# EAGLE board wchair - Copy (3) (EAGLE 9.2.2)
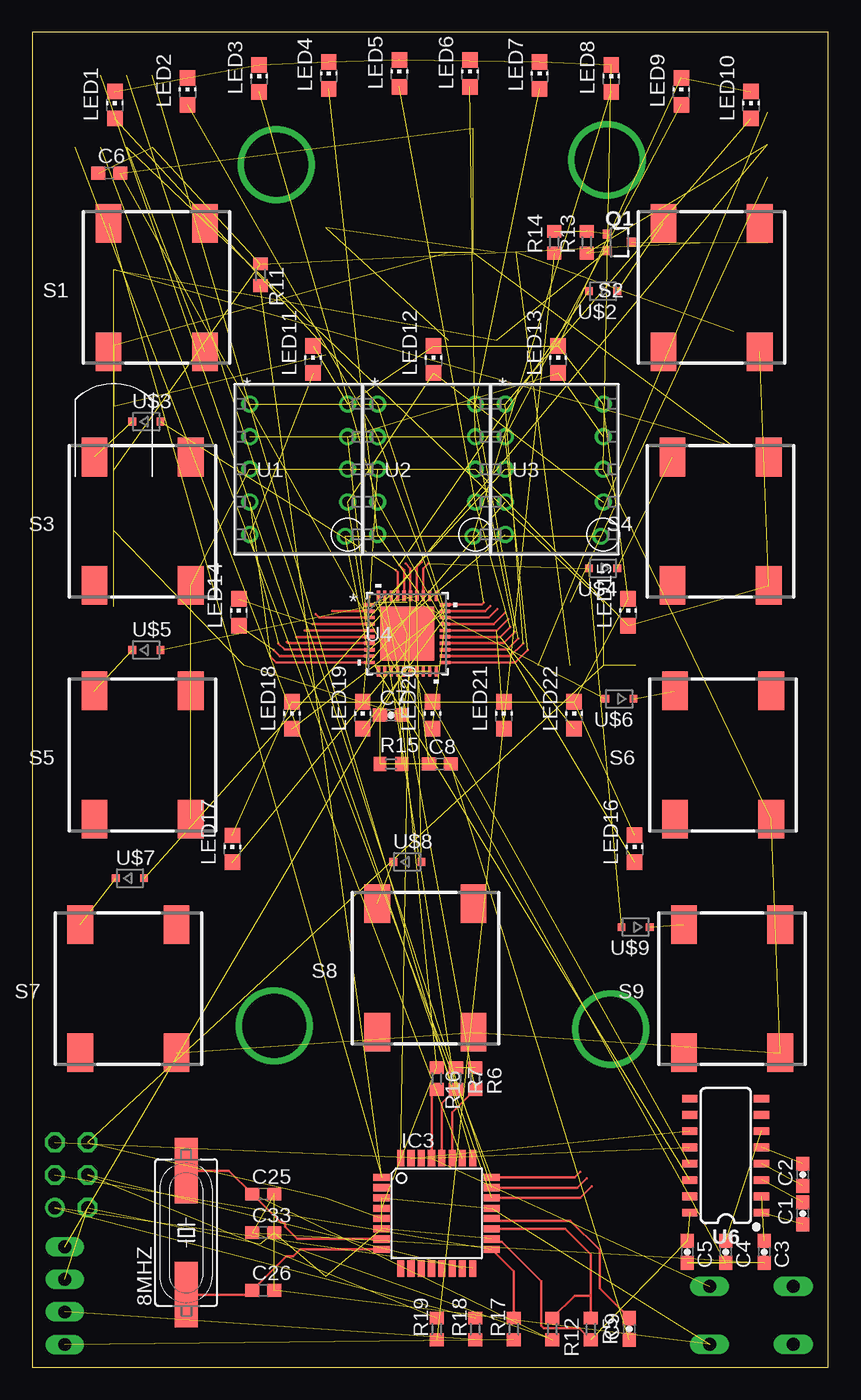
[diagram p0: board, top side]
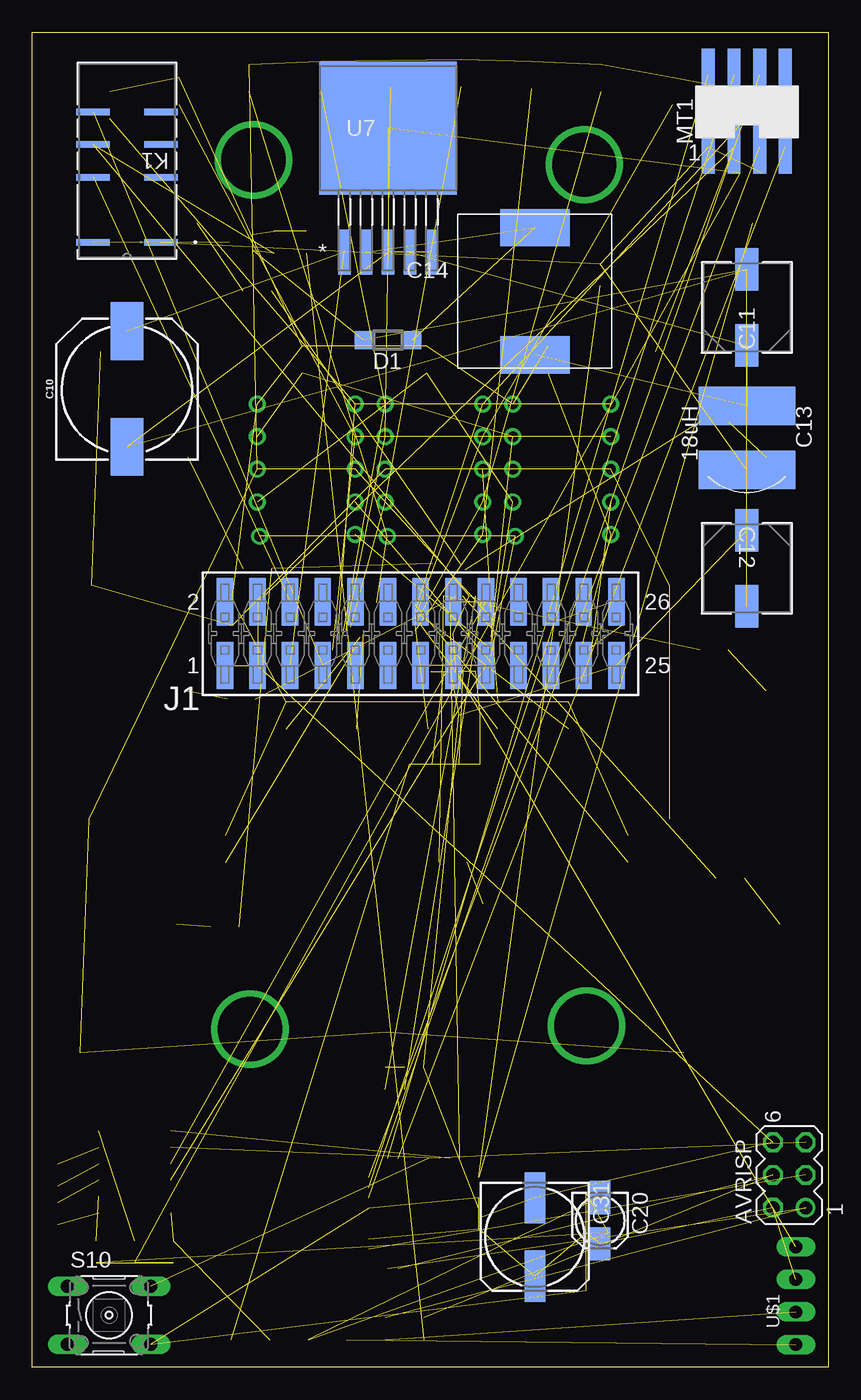
[diagram p1: board, bottom side, seen from below]

Size 62 x 104 mm. Coordinates in mm from the lower left corner, seen from the top.
Outline: 0,0 62,0 62,104 0,104 0,0
Copper layers (1*16): Top 0.035mm / dielectric 1.5mm / Bottom 0.035mm
Design rules "default": minimum track width 6mil, minimum drill 0.35mm, track to track 6mil, track to pad 6mil, pad to pad 6mil, via to via 6mil, smd to smd 6mil, copper to edge 40mil, drill to drill 6mil, minimum pad ring 10mil, minimum via ring 8mil, stop-mask expansion 4mil, vias tented up to drill 0mil, thermal gap 10mil
Net classes: 1 supply: width 0.127 mm, clearance 0.203 mm

## Footprints (pad centres in the part's own frame; a part is rotated, then mirrored left to right if it is on the bottom)
SM49 = smd 5.08 x 1.778: 1 -4.826,0; 2 4.826,0
MA03-2 = drill 1.016: 1 -2.54,-1.27 | drill 1.016 octagon: 2 -2.54,1.27; 3 0,-1.27; 4 0,1.27; 5 2.54,-1.27; 6 2.54,1.27
0603-CAP = smd 1.1 x 1: 1 -0.85,0; 2 0.85,0
C0603 = smd 1.1 x 1: 1 -0.85,0; 2 0.85,0
NIC_10X10.5_CAP = smd 4.5 x 2.5: + 4.5,0; - -4.5,0
CAP_EEFK_D8 = smd 3.302 x 1.778: 1 -2.959,0; 2 2.959,0
CAP_EEE_D = smd 3.302 x 1.778: 1 -2.959,0; 2 2.959,0
18UH2.15A = smd 3 x 7.5: 1 -2.5,0; 2 2.5,0
732-1698-1-ND = smd 5.4 x 2.9: 1 0,4.95; 2 0,-4.95
153CLV-0405 = smd 2.6 x 1.6: + 1.8,0; - -1.8,0
153CLV-0807 = smd 4 x 1.6: + 3.05,0; - -3.05,0
SOD123 = smd 1.4 x 1.4: A 1.9,0; C -1.9,0
TQFP32-08 = smd 1.27 x 0.559: 1 -4.293,2.8; 2 -4.293,2; 3 -4.293,1.2; 4 -4.293,0.4; 5 -4.293,-0.4; 6 -4.293,-1.2; 7 -4.293,-2; 8 -4.293,-2.8; 17 4.293,-2.8; 18 4.293,-2; 19 4.293,-1.2; 20 4.293,-0.4; 21 4.293,0.4; 22 4.293,1.2; 23 4.293,2; 24 4.293,2.8 | smd 0.559 x 1.27: 9 -2.8,-4.293; 10 -2,-4.293; 11 -1.2,-4.293; 12 -0.4,-4.293; 13 0.4,-4.293; 14 1.2,-4.293; 15 2,-4.293; 16 2.8,-4.293; 25 2.8,4.293; 26 2,4.293; 27 1.2,4.293; 28 0.4,4.293; 29 -0.4,4.293; 30 -1.2,4.293; 31 -2,4.293; 32 -2.8,4.293
SAMTEC-TSM-113-01-X-DV = smd 1.27 x 3.68: 1 -15.24,-2.476; 2 -15.24,2.476; 3 -12.7,-2.476; 4 -12.7,2.476; 5 -10.16,-2.476; 6 -10.16,2.476; 7 -7.62,-2.476; 8 -7.62,2.476; 9 -5.08,-2.476; 10 -5.08,2.476; 11 -2.54,-2.476; 12 -2.54,2.476; 13 0,-2.476; 14 0,2.476; 15 2.54,-2.476; 16 2.54,2.476; 17 5.08,-2.476; 18 5.08,2.476; 19 7.62,-2.476; 20 7.62,2.476; 21 10.16,-2.476; 22 10.16,2.476; 23 12.7,-2.476; 24 12.7,2.476; 25 15.24,-2.476; 26 15.24,2.476
EE2NUH = smd 2.616 x 0.508: 1 -2.642,6.363; 3 -2.642,1.283; 4 -2.642,-1.257; 5 -2.642,-3.797; 8 2.642,-3.797; 9 2.642,-1.257; 10 2.642,1.283; 12 2.642,6.363
CHIP-LED0805 = smd 1.2 x 1.2: A 0,-1.05; C 0,1.05
MINITEK2-8PINS = smd 1 x 4.1: F1 -3,-2.75; F2 -3,2.85; F3 -1,-2.75; F4 -1,2.85; F5 1,-2.75; F6 1,2.85; F7 3,-2.75; F8 3,2.85
SOT323 = smd 0.7 x 0.7: 1 -0.65,-0.925; 2 0.65,-0.925; 3 0,0.925
R0603 = smd 1 x 1.1: 1 -0.85,0; 2 0.85,0
IP40-J-LEAD = smd 3 x 2: 1 -5,-3.75; 2 5,-3.75; 3 5,3.75; 4 -5,3.75
B3F-10XX = drill 1.016 long: 1 -3.251,2.261; 2 3.251,2.261; 3 -3.251,-2.261; 4 3.251,-2.261
DIP10_TDS = drill 0.813 pad 1.321: 1 -3.725,5.93; 2 -3.725,3.39; 3 -3.725,0.85; 4 -3.725,-1.69; 5 -3.725,-4.23; 6 3.707,-4.37; 7 3.895,-1.69; 8 3.895,0.85; 9 3.895,3.39; 10 3.895,5.93
21-0141I_T4066-5 = smd 0.813 x 0.254: 1 -2.946,2.25; 2 -2.946,1.75; 3 -2.946,1.25; 4 -2.946,0.75; 5 -2.946,0.25; 6 -2.946,-0.25; 7 -2.946,-0.75; 8 -2.946,-1.25; 9 -2.946,-1.75; 10 -2.946,-2.25; 21 2.946,-2.25; 22 2.946,-1.75; 23 2.946,-1.25; 24 2.946,-0.75; 25 2.946,-0.25; 26 2.946,0.25; 27 2.946,0.75; 28 2.946,1.25; 29 2.946,1.75; 30 2.946,2.25 | smd 0.254 x 0.813: 11 -2.25,-2.946; 12 -1.75,-2.946; 13 -1.25,-2.946; 14 -0.75,-2.946; 15 -0.25,-2.946; 16 0.25,-2.946; 17 0.75,-2.946; 18 1.25,-2.946; 19 1.75,-2.946; 20 2.25,-2.946; 31 2.25,2.946; 32 1.75,2.946; 33 1.25,2.946; 34 0.75,2.946; 35 0.25,2.946; 36 -0.25,2.946; 37 -0.75,2.946; 38 -1.25,2.946; 39 -1.75,2.946; 40 -2.25,2.946 | smd 4.191 x 4.191: 41 0,0
SO16 = smd 0.6 x 1.2: 1 -4.445,-2.8; 2 -3.175,-2.8; 3 -1.905,-2.8; 4 -0.635,-2.8; 5 0.635,-2.8; 6 1.905,-2.8; 7 3.175,-2.8; 8 4.445,-2.8; 9 4.445,2.8; 10 3.175,2.8; 11 1.905,2.8; 12 0.635,2.8; 13 -0.635,2.8; 14 -1.905,2.8; 15 -3.175,2.8; 16 -4.445,2.8
KTT5_6P22X6P86 = smd 0.965 x 3.505: 1 -3.4,-9.652; 2 -1.7,-9.652; 3 0,-9.652; 4 1.7,-9.652; 5 3.4,-9.652 | smd 10.719 x 10.363: 6 0,0
4-PIN-HEADER = drill 1 long: 1 -3.81,0; 2 -1.27,0; 3 1.27,0; 4 3.81,0
SOD-323 = smd 0.6 x 0.6: A 1.1,0; C -1.1,0

## Placement (x,y rotation side)
8MHZ  8MHz  [SM49]  12,10.5 90 top
AVRISP  [MA03-2]  3.05,14.99 90 bottom
C1  .1uF  [0603-CAP]  60,12 90 top
C2  .1uF  [0603-CAP]  60,15 90 top
C3  .1uF  [0603-CAP]  57,9 270 top
C4  .1uF  [0603-CAP]  54,9 270 top
C5  .1uF  [0603-CAP]  51,9 270 top
C6  2.2u  [C0603]  6,93 0 top
C7  .1uF  [0603-CAP]  27.94,50.8 0 top
C8  22pF  [C0603]  31.75,46.99 0 top
C9  .1uF  [0603-CAP]  46.5,3 90 top
C10  100uF  [NIC_10X10.5_CAP]  54.61,76.2 90 bottom
C11  330uF  [CAP_EEFK_D8]  6.35,82.55 90 bottom
C12  100uF  [CAP_EEE_D]  6.35,62.23 270 bottom
C13  18uH  [18UH2.15A]  6.35,72.39 270 bottom
C14  330uH  [732-1698-1-ND]  22.86,83.82 0 bottom
C20  10uF  [153CLV-0405]  17.78,11.43 270 bottom
C25  22pF  [C0603]  18,13.5 0 top
C26  22pF  [C0603]  18,6 0 top
C31  68uF  [153CLV-0807]  22.86,10.16 270 bottom
C33  2.2u  [C0603]  18,10.5 0 top
D1  MBR0520LT  [SOD123]  34.29,80.01 180 bottom
IC3  MEGA8-AI  [TQFP32-08]  31.5,12 0 top
J1  SAMTEC-TSM-113-01-X-DVJ  [SAMTEC-TSM-113-01-X-DV]  31.75,57.15 0 bottom
K1  EE2-5NUH-L  [EE2NUH]  54.61,93.98 180 bottom
LED1  [CHIP-LED0805]  6.44,98.31 0 top
LED2  [CHIP-LED0805]  12.1,99.38 0 top
LED3  [CHIP-LED0805]  17.68,100.4 0 top
LED4  [CHIP-LED0805]  23.1,100.62 0 top
LED5  [CHIP-LED0805]  28.59,100.78 0 top
LED6  [CHIP-LED0805]  34.09,100.78 0 top
LED7  [CHIP-LED0805]  39.52,100.62 0 top
LED8  [CHIP-LED0805]  45.09,100.4 0 top
LED9  [CHIP-LED0805]  50.55,99.38 0 top
LED10  [CHIP-LED0805]  55.97,98.31 0 top
LED11  [CHIP-LED0805]  21.87,78.5 0 top
LED12  [CHIP-LED0805]  31.26,78.5 0 top
LED13  [CHIP-LED0805]  40.95,78.5 0 top
LED14  [CHIP-LED0805]  16.09,58.81 0 top
LED15  [CHIP-LED0805]  46.41,58.81 0 top
LED16  [CHIP-LED0805]  46.91,40.38 0 top
LED17  [CHIP-LED0805]  15.59,40.38 0 top
LED18  [CHIP-LED0805]  20.23,50.79 0 top
LED19  [CHIP-LED0805]  25.75,50.79 0 top
LED20  [CHIP-LED0805]  31.17,50.79 0 top
LED21  [CHIP-LED0805]  36.73,50.79 0 top
LED22  [CHIP-LED0805]  42.2,50.79 0 top
MT1  MINITEK2-8PINS  [MINITEK2-8PINS]  6.35,97.79 0 bottom
Q1  310mA/60V/1.6Ω  [SOT323]  45.72,87.63 270 top
R5  390k  [R0603]  43.5,3 270 top
R6  4.7k  [R0603]  34.5,22.5 270 top
R7  4.7k  [R0603]  33,22.5 270 top
R11  10k  [R0603]  17.78,85.09 270 top
R12  100k  [R0603]  40.5,3 270 top
R13  100k  [R0603]  43.18,87.63 90 top
R14  220  [R0603]  40.64,87.63 90 top
R15  56k  [R0603]  27.94,46.99 0 top
R16  1k  [R0603]  31.5,22.5 270 top
R17  100  [R0603]  37.5,3 90 top
R18  100  [R0603]  34.5,3 90 top
R19  100  [R0603]  31.5,3 90 top
S1  1241.1619.23  [IP40-J-LEAD]  9.7,84.1 90 top
S2  1241.1619.23  [IP40-J-LEAD]  52.9,84.1 90 top
S3  1241.1619.23  [IP40-J-LEAD]  8.6,65.9 90 top
S4  1241.1619.23  [IP40-J-LEAD]  53.6,65.9 90 top
S5  1241.1619.23  [IP40-J-LEAD]  8.6,47.7 90 top
S6  1241.1619.23  [IP40-J-LEAD]  53.8,47.7 90 top
S7  1241.1619.23  [IP40-J-LEAD]  7.5,29.5 90 top
S8  1241.1619.23  [IP40-J-LEAD]  30.62,31.1 90 top
S9  1241.1619.23  [IP40-J-LEAD]  54.5,29.5 90 top
S10  [B3F-10XX]  56.01,4.06 0 bottom
U1  TDSG3160  [DIP10_TDS]  20.68,69.1 0 top
U2  TDSG3160  [DIP10_TDS]  30.62,69.1 0 top
U3  TDSG3160  [DIP10_TDS]  40.58,69.1 0 top
U4  MAX6955ATL+  [21-0141I_T4066-5]  29.21,57.15 0 top
U6  MAX3232  [SO16]  54,16.5 90 top
U7  TL2575HV-05IKTTR  [KTT5_6P22X6P86]  34.29,96.52 0 bottom
U$1  DEBUG  [4-PIN-HEADER]  2.54,5.59 90 bottom
U$2  SCHOTTKY  [SOD-323]  44.45,83.82 180 top
U$3  SCHOTTKY  [SOD-323]  8.89,73.66 0 top
U$4  SCHOTTKY  [SOD-323]  44.45,62.23 180 top
U$5  SCHOTTKY  [SOD-323]  8.89,55.88 0 top
U$6  SCHOTTKY  [SOD-323]  45.72,52.07 180 top
U$7  SCHOTTKY  [SOD-323]  7.62,38.1 0 top
U$8  SCHOTTKY  [SOD-323]  29.21,39.37 0 top
U$9  SCHOTTKY  [SOD-323]  46.99,34.29 180 top

## Library data of the parts
8MHZ = crystal; DIGIKEY: 535-9089-1-ND; OC_FARNELL: unknown; OC_NEWARK: unknown
AVRISP = con-lstb; DIGIKEY: ED10665-ND; OC_FARNELL: unknown; OC_NEWARK: unknown
C1-C5 C7 C9 = SparkFun-Capacitors; DIGIKEY: 399-15351-1-ND; PROD_ID: CAP-00810; SPARKLE_ID: 918
C6 C33 = adafruit; DIGIKEY: 1276-1183-1-ND
C8 C25 C26 = adafruit; DIGIKEY: 478-11384-1-ND
C10 = SparkFun-Capacitors; DIGIKEY: PCE3942CT-ND; PROD_ID: CAP-08362; SPICEPREFIX: C
C11 = my_lib; DIGIKEY: PCE3768CT-ND; MANUFACTURER_PART_NUMBER: EEEFK0J331XP; VENDOR: Panasonic
C12 = my_lib; DIGIKEY: PCE3852CT-ND; MANUFACTURER_PART_NUMBER: EEE0JA101SP; VENDOR: Panasonic
C13 = AAAmy_lib_chair; DIGIKEY: 732-4533-1-ND
C14 = AAAmy_lib_chair; DIGIKEY: 732-1698-1-ND
C20 = rcl; CODE: 865250140001; DIGIKEY: 493-2173-1-ND; SPICEPREFIX: C
C31 = rcl; CODE: EEEFC0J680P; DIGIKEY: PCE4412CT-ND‎; SPICEPREFIX: C
D1 = diode; DIGIKEY: MBR0520LCT-ND
IC3 = atmel; DIGIKEY: ATMEGA328P-AU-ND; MPN: ATMEGA8-16AU; OC_FARNELL: 9171371; OC_NEWARK: 73M8863
J1 = SAMTEC-TSM-113-01-X-DV; DESCRIPTION: Conn Unshrouded Header HDR 26 POS 2.54mm Solder ST SMD Automotive Tube; DIGI-KEY_PURCHASE_URL: https://www.digikey.com/product-detail/en/samtec-inc/TSM-113-01-L-DV/SAM10304-ND/6679041?utm_source=snapeda&utm_medium=aggregator&utm_campaign=symbol; DIGIKEY: SAM10304-ND; MF: Samtec Inc.; MP: TSM-113-01-L-DV; PACKAGE: None
K1 = AAAmy_lib_chair; DIGIKEY: 399-11016-1-ND‎; MANUFACTURER_PART_NUMBER: EE25NUHL; VENDOR: KEMET
LED1-LED22 = led; DIGIKEY: 1497-1434-1-ND
MT1 = my_lib; DIGIKEY: 609-5175-1-ND
Q1 = SparkFun-DiscreteSemi; DIGIKEY: SI2304BDS-T1-GE3CT-ND; PROD_ID: TRANS-11151
R5 = adafruit; DIGIKEY: 311-390KGRCT-ND
R6 R7 = adafruit; DIGIKEY: 311-4.7KGRCT-ND
R11 = rcl; DIGIKEY: RNCP0603FTD10K0CT-ND
R12 R13 = adafruit; DIGIKEY: RR08P100KDCT-ND
R14 = adafruit; DIGIKEY: A130087CT-ND
R15 = adafruit; DIGIKEY: 749-1667-1-ND
R16 = rcl; DIGIKEY: RHM1.0KDCT-ND
R17-R19 = rcl; DIGIKEY: RR08P100DCT-ND
S1-S9 = my_pushbot; DESCRIPTION: 1-pole on-off switch Latching Push Button Switch, IP67, PCB, 30 V ac, 42 V dc; DIGIKEY: 486-1931-1-ND; HEIGHT: mm; MANUFACTURER_NAME: SCHURTER; MANUFACTURER_PART_NUMBER: 1241.1619.23; MOUSER_PART_NUMBER: 693-1241.1619.23; MOUSER_PRICE-STOCK: https://www.mouser.com/Search/Refine.aspx?Keyword=693-1241.1619.23
S10 = switch-omron; DIGIKEY: SW400-ND; MPN: B3F-1000; OC_FARNELL: 176432; OC_NEWARK: 36M3542
U1-U3 = 7segment; DIGIKEY: TDSG3160-M-ND; MANUFACTURER_PART_NUMBER: TDSG3160; VENDOR: Vishay
U4 = AAAmy_lib_chair; DIGIKEY: MAX6955ATL+-ND; MANUFACTURER_PART_NUMBER: MAX6955ATL+; VENDOR: Maxim Integrated Products
U6 = SparkFun-IC-Comms; DIGIKEY: 296-14619-1-ND; PROD_ID: IC-08171
U7 = my_lib; DIGIKEY: 296-21833-1-ND; MANUFACTURER_PART_NUMBER: TL2575HV05IKTTR; VENDOR: Texas Instruments
U$1 = AAAmy_lib_chair; DIGIKEY: 0
U$2-U$9 = AAAmy_lib_chair; DIGIKEY: CUS520H3FDKR-ND

## Nets
C1+: C1.1 U6.1
C1-: C1.2 U6.3
C2+: C2.1 U6.4
C2-: C2.2 U6.5
GND: AVRISP.6 C3.2 C4.2 C5.2 C6.2 C7.1 C8.2 C9.1 C10.- C11.2 C12.2 C20.- C25.2 C26.2 C31.- C33.1 D1.A IC3.3 IC3.5 IC3.21 J1.1 J1.3 J1.4 K1.9 MT1.F3 Q1.2 R12.2 R13.1 R15.1 S1.1 S10.4 U4.1 U4.12 U4.13 U4.15 U4.38 U4.41 U6.15 U7.3 U7.5 U7.6 U$1.4
JOY_CNTR: IC3.22 MT1.F6
JOY_FR1: IC3.23 MT1.F4
JOY_FR2: IC3.24 MT1.F5
JOY_LR1: IC3.25 MT1.F2
JOY_LR2: IC3.26 MT1.F7
MISO: AVRISP.1 IC3.16 R18.2
MOSI: AVRISP.4 IC3.15 R19.2
N$1: S2.3 U$2.C
N$2: MT1.F8
N$3: S9.3 U$9.C
N$6: LED6.C
N$8: S7.3 U$7.C
N$11: U4.32
N$16: S8.3 U$8.C
N$17: Q1.1 R13.2 R14.2
N$18: S6.3 U$6.C
N$19: K1.12 Q1.3
N$20: S4.3 U$4.C
N$21: S5.3 U$5.C
N$22: S3.3 U$3.C
N$23: R6.1 R7.1
N$30: U4.31
N$31: R15.2 U4.14
N$32: C8.1 U4.17
N$35: 8MHZ.2 C25.1 IC3.7
N$36: 8MHZ.1 C26.1 IC3.8
N$37: C9.2 IC3.20
O0: LED15.A S2.1 S3.1 S4.1 S5.1 U1.3 U1.8 U2.3 U2.8 U4.2
O1: LED1.C LED2.C LED3.C LED4.C LED5.C LED7.C LED8.C S6.1 S7.1 S8.1 S9.1 U3.3 U3.8 U4.3
O2: LED9.C LED10.C LED11.C LED12.C LED13.C LED14.C LED15.C LED16.C LED17.C LED18.C LED19.C LED20.C LED21.C LED22.C U1.10 U3.10 U4.4
O3: U4.5
O4: LED13.A U1.9 U3.9 U4.6
O5: LED12.A U1.7 U3.7 U4.7
O6: LED11.A U1.5 U3.5 U4.8
O7: LED14.A U1.6 U3.6 U4.9
O8: U1.4 U3.4 U4.10
O9: LED9.A U1.2 U3.2 U4.21
O10: LED10.A U1.1 U3.1 U4.22
O11: LED7.A LED16.A U2.10 U4.23
O12: LED6.A U2.9 U4.24
O13: LED5.A LED22.A U2.7 U4.25
O14: LED4.A LED21.A U2.5 U4.26
O15: LED3.A LED20.A U2.4 U4.27
O16: LED2.A LED19.A U2.2 U4.28
O17: LED1.A LED18.A U2.1 U4.29
O18: LED8.A LED17.A U2.6 U4.30
P0: U4.36 U$2.A U$6.A
P1: U4.37 U$3.A U$7.A
P2: U4.33 U$4.A U$9.A
P3: U4.34 U$5.A U$8.A
P4: IC3.32 U4.35
R1IN: J1.16 J1.18 U6.13
R1OUT: IC3.30 U6.12
REG_FB: C11.1 C13.1 C14.2 U7.4
REG_P_O: C14.1 D1.C U7.2
RELAY_NC: J1.6 K1.10
RELAY_NO: J1.7 K1.8
RESET: AVRISP.5 IC3.29 R16.2 S10.2
RLY_OUT: R14.1 R19.1
RX: R17.1 U$1.1
SCK: AVRISP.3 IC3.17 R17.2
SCL: IC3.28 R7.2 U4.40
SDA: IC3.27 R6.2 U4.39
SW_ON: IC3.1 R11.2 S1.3
T1IN: IC3.31 U6.11
T1OUT: J1.13 J1.17 U6.14
TX: R18.1 U$1.2
V+: C3.1 U6.2
V-: C4.1 U6.6
V_BAT: IC3.19 R5.1 R12.1
VCC [supply]: AVRISP.2 C5.1 C6.1 C7.2 C12.1 C13.2 C20.+ C31.+ C33.2 IC3.4 IC3.6 IC3.18 J1.25 K1.1 MT1.F1 R5.2 R11.1 R16.1 U4.16 U4.18 U4.19 U6.16 U$1.3
VIN_BRD: C10.+ J1.5 U7.1

## Tracks (layer width: path | path; a pad name or v marks a point on that pad's centre or on a via)
C1+  (1 unrouted)
C1-  (1 unrouted)
C2+  (1 unrouted)
C2-  (1 unrouted)
GND  (41 unrouted)
JOY_CNTR  (1 unrouted)
  Top 0.2: IC3.22 42.66,13.2 43.56,14.1
JOY_FR1  (1 unrouted)
  Top 0.2: IC3.23 42.45,14 43.18,14.73
JOY_FR2  (1 unrouted)
  Top 0.2: IC3.24 42.23,14.8 42.67,15.24
JOY_LR1  (1 unrouted)
JOY_LR2  (1 unrouted)
MISO  (2 unrouted)
MOSI  (2 unrouted)
N$1  (1 unrouted)
N$3  (1 unrouted)
N$8  (1 unrouted)
N$12  (via drill 5)
  other vias: 19.01,93.67
N$13  (via drill 5)
  other vias: 44.76,94.04
N$14  (via drill 5)
  other vias: 18.85,26.59
N$15  (via drill 5)
  other vias: 45.04,26.35
N$16  (1 unrouted)
N$17  (2 unrouted)
N$18  (1 unrouted)
N$19  (1 unrouted)
N$20  (1 unrouted)
N$21  (1 unrouted)
N$22  (1 unrouted)
N$23  (1 unrouted)
N$31  (1 unrouted)
N$32  (1 unrouted)
N$35
  Top 0.2: 8MHZ.2 15.32,15.33 C25.1 19.35,11.3 19.53,11.3 19.7,11.13 19.7,10.95 20.65,10 IC3.7
N$36
  Top 0.2: 8MHZ.1 16.82,5.67 C26.1 19.79,8.64 20.32,8.64 20.88,9.2 IC3.8
N$37
  Top 0.2: C9.2 44.2,6.15 44.2,9.14 41.91,11.43 35.96,11.43 IC3.20
O0  (9 unrouted)
  Top 0.2: U4.2 26.24,58.93 23.37,58.93
O1  (13 unrouted)
  Top 0.2: U4.3 22.37,58.4 22.1,58.67
O2  (16 unrouted)
  Top 0.2: U4.4 26.25,57.91 21.84,57.91
O3
  Top 0.2: U4.5 21.21,57.4
O4  (3 unrouted)
  Top 0.2: U4.6 20.58,56.9 20.57,56.9
O5  (3 unrouted)
  Top 0.2: U4.7 19.93,56.4 19.81,56.52
O6  (3 unrouted)
  Top 0.2: U4.8 19.66,55.9 19.18,56.39
O7  (3 unrouted)
  Top 0.2: U4.9 19.28,55.4 18.8,55.88
O8  (2 unrouted)
  Top 0.2: U4.10 19.01,54.9 18.54,55.37
O9  (3 unrouted)
  Top 0.2: U4.21 37.63,54.9 38.61,55.88
O10  (3 unrouted)
  Top 0.2: U4.22 37.24,55.4 38.23,56.39
O11  (3 unrouted)
  Top 0.2: U4.23 36.98,55.9 37.85,56.77
O12  (2 unrouted)
  Top 0.2: U4.24 36.72,56.4 37.59,57.28
O13  (3 unrouted)
  Top 0.2: U4.25 36.45,56.9 37.21,57.66
O14  (3 unrouted)
  Top 0.2: U4.26 36.19,57.4 37.08,58.29
O15  (3 unrouted)
  Top 0.2: U4.27 35.93,57.9 36.83,58.8
O16  (3 unrouted)
  Top 0.2: U4.28 35.54,58.4 36.2,59.05
O17  (3 unrouted)
  Top 0.2: U4.29 35.28,58.9 35.69,59.31
O18  (3 unrouted)
  Top 0.2: U4.30 35.02,59.4 35.18,59.56
P0  (2 unrouted)
  Top 0.2: U4.36 28.96,62.1 28.57,62.48
P1  (2 unrouted)
  Top 0.2: U4.37 28.46,61.96 28.32,62.1
P2  (2 unrouted)
  Top 0.2: U4.33 30.46,62.21 30.86,62.61
P3  (2 unrouted)
  Top 0.2: U4.34 29.96,62.34 30.35,62.74
P4  (1 unrouted)
  Top 0.2: U4.35 29.46,62.23 29.08,62.61
R1IN  (2 unrouted)
R1OUT  (1 unrouted)
REG_FB  (3 unrouted)
REG_P_O  (2 unrouted)
RELAY_NC  (1 unrouted)
RELAY_NO  (1 unrouted)
RESET  (2 unrouted)
  Top 0.2: IC3.29 31.1,21.25 R16.2
RLY_OUT  (1 unrouted)
RX  (1 unrouted)
SCK  (1 unrouted)
  Top 0.2: IC3.17 37.5,7.49 R17.2
SCL  (1 unrouted)
  Top 0.2: IC3.28 31.9,20.55 R7.2
SDA  (1 unrouted)
  Top 0.2: IC3.27 32.7,19.85 R6.2
SW_ON  (2 unrouted)
T1IN  (1 unrouted)
T1OUT  (2 unrouted)
TX  (1 unrouted)
V+  (1 unrouted)
V-  (1 unrouted)
V_BAT
  Top 0.2: IC3.19 41.52,10.8 43.5,8.82 43.5,5.59 | 43.5,5.59 R5.1 | R12.1 42.24,5.59 43.5,5.59
VCC  (21 unrouted)
  Top 0.2: IC3.18 35.79,9.86 35.87,9.78 36.55,9.78 39.65,6.69 39.65,3.22 39.82,3.05 42.6,3.05 R5.2
VIN_BRD  (2 unrouted)